# Altium PCB water_sensor_pcb.PcbDoc
Units mil, origin at the board's own origin, x right, y up, seen from the top; angles counter-clockwise.
Board outline 2362.2 x 1377.95 mil, 2 copper layers (Top Layer, Bottom Layer); 39 components, 24 nets, 132 pads, 39 vias.
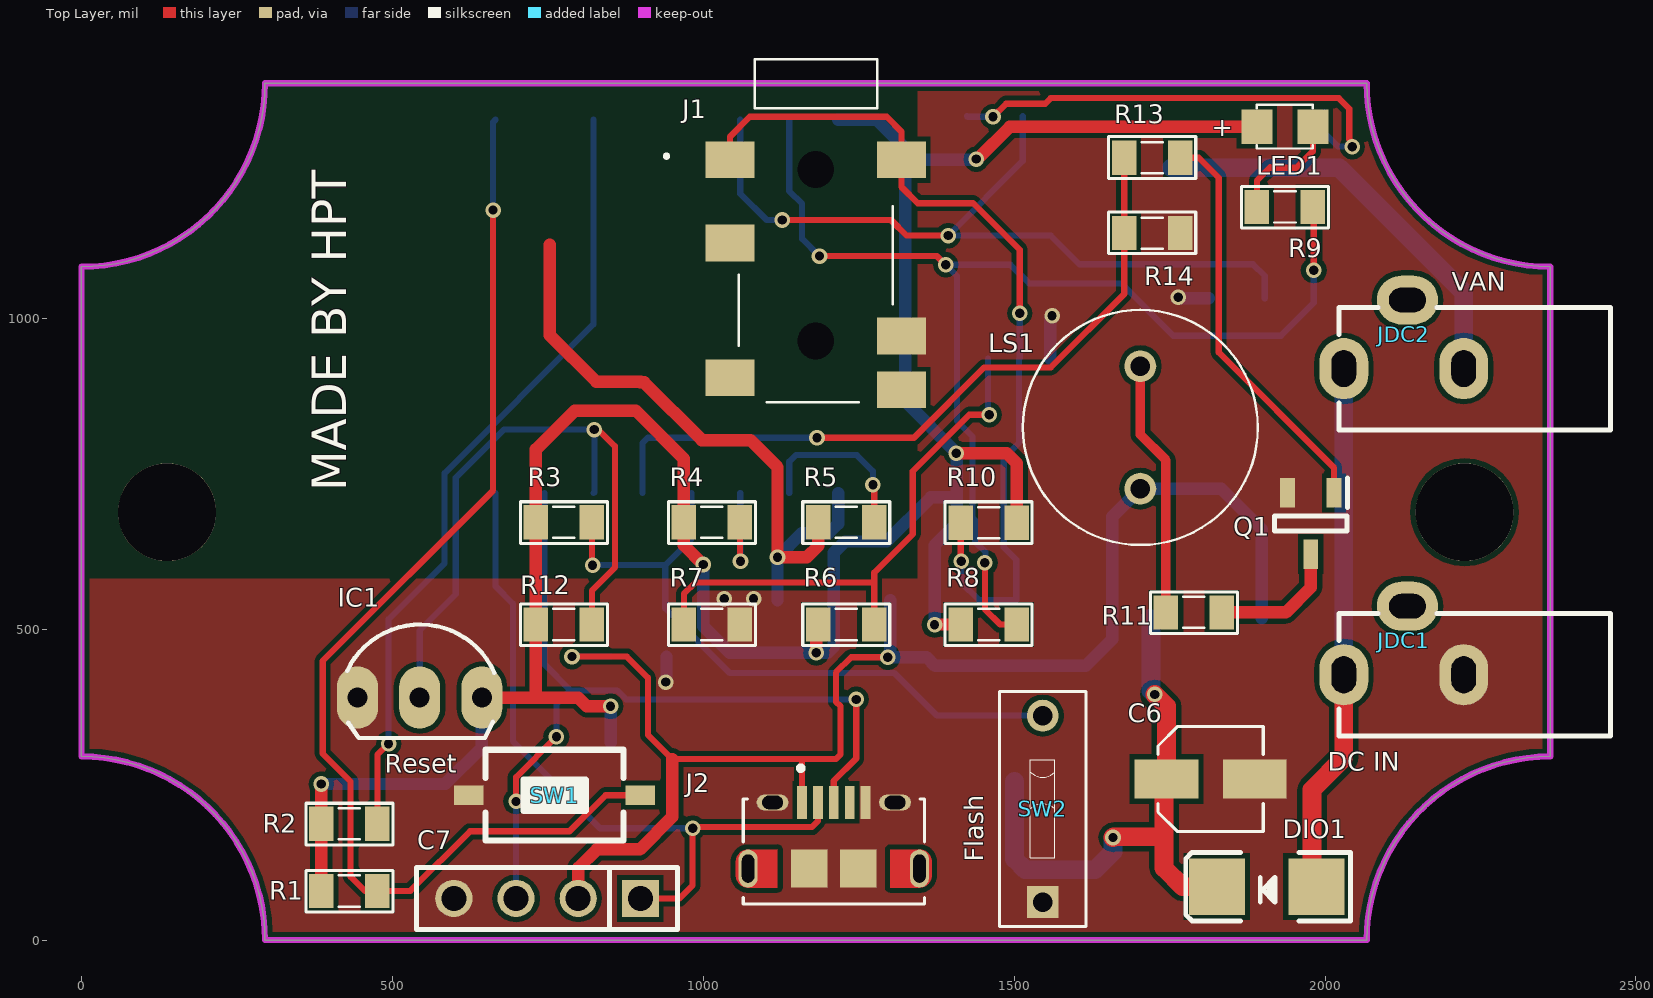
[diagram p0: Top Layer view]
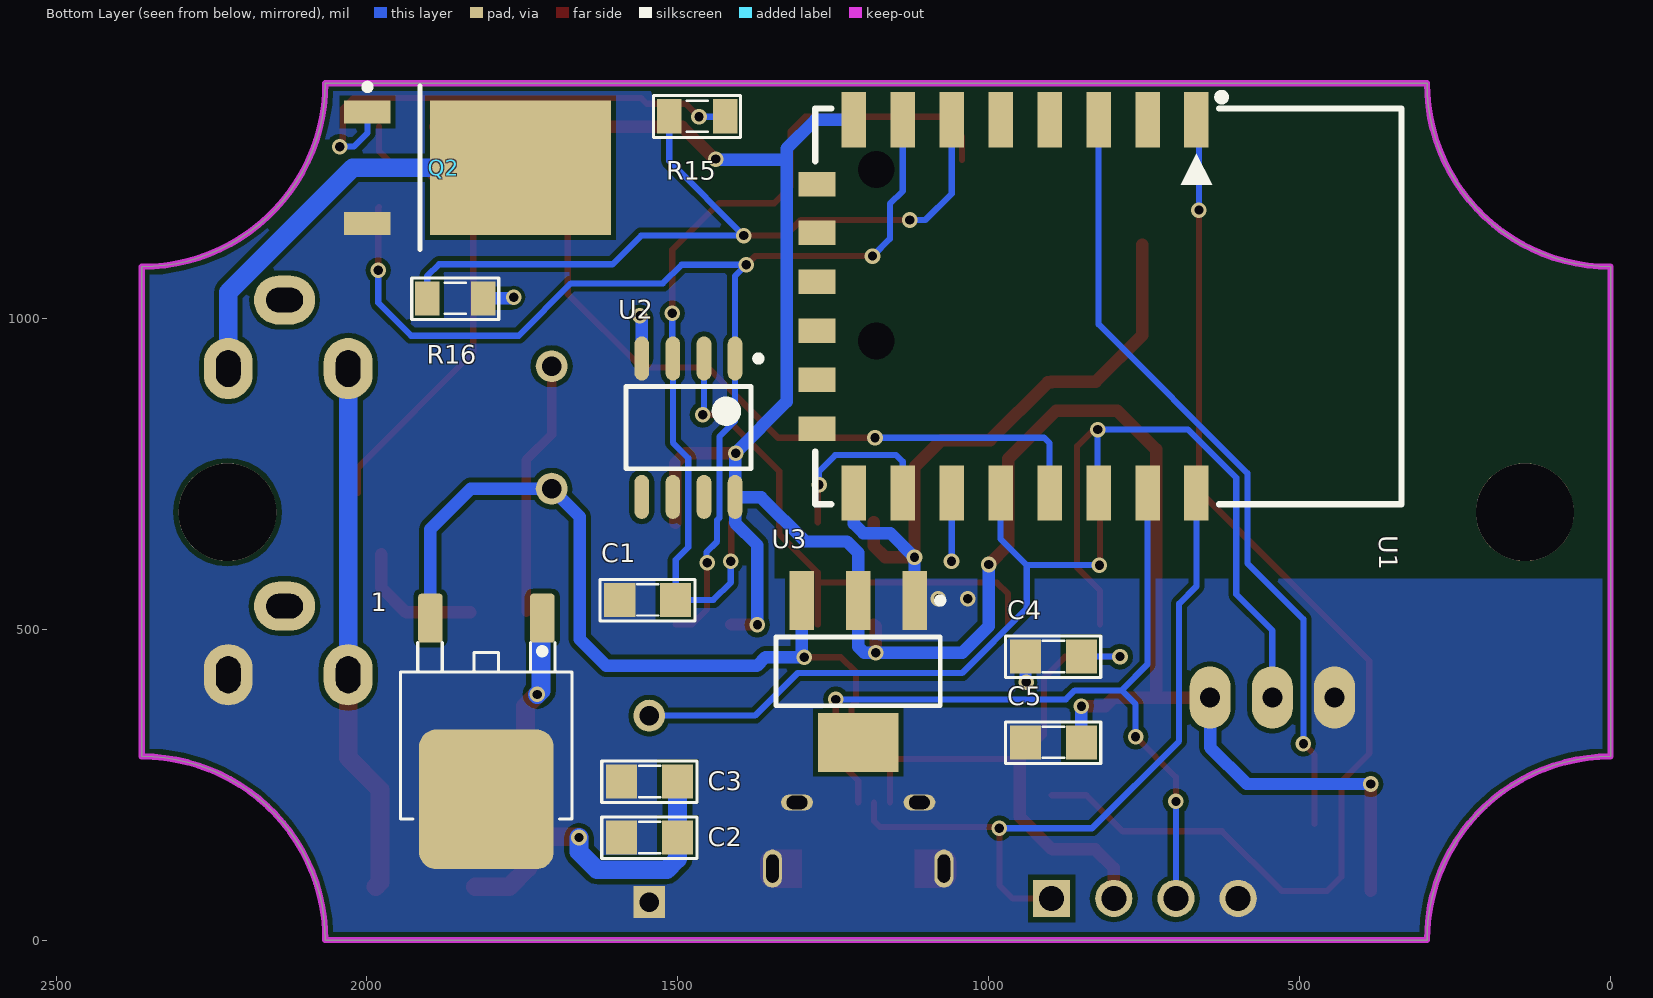
[diagram p1: Bottom Layer view, seen from below]
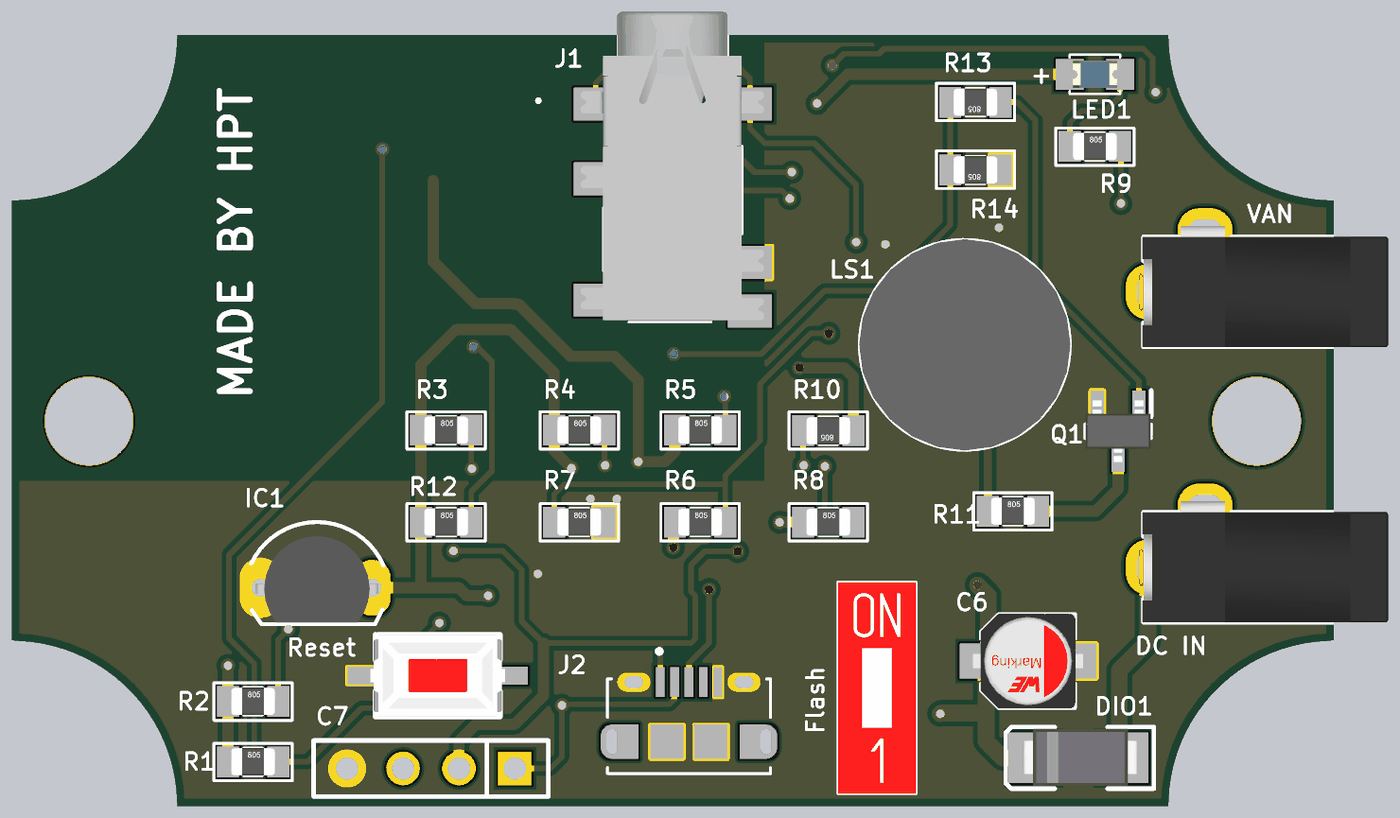
[diagram p2: 3D render of the assembled board from above, using the file's embedded part models]
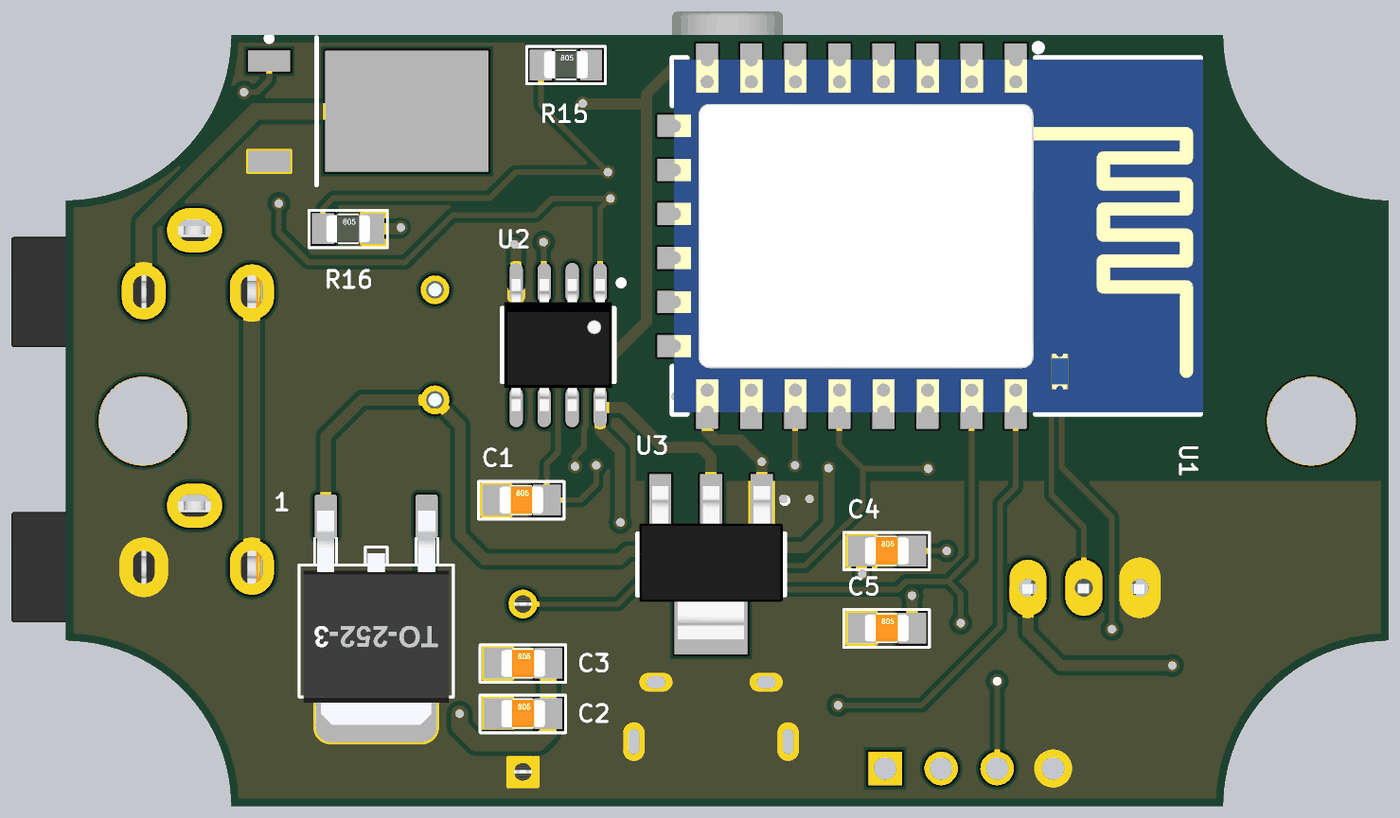
[diagram p3: 3D render of the assembled board from below, using the file's embedded part models]

## Layer stack, top to bottom
Top Solder: solder mask 0.4, Solder Resist, Dk 3.5
Top Layer: signal copper 1.4
Dielectric 1: dielectric 12.6, FR-4, Dk 4.8
Bottom Layer: signal copper 1.4
Bottom Solder: solder mask 0.4, Solder Resist, Dk 3.5

## Board outline
0,296.28 0,1083.68 ccw(c0,1378.95) 295.27,1378.95 2066.93,1378.95 ccw(c2362.2,1378.95) 2362.2,1083.68 2362.2,296.28 ccw(c2362.2,1) 2066.93,1 295.27,1 ccw(c0,1)

## Design rules (kind name [scope] priority, off if disabled: settings)
Clearance [All] p1: gap=8
PlaneConnect [All] p1: planeconnectstyle=Direct reliefexpansion=20 reliefentries=4 reliefconductorwidth=10 reliefairgap=10
PolygonConnect [All] p1: connectstyle=Direct reliefconductorwidth=10 reliefentries=4 polygonreliefangle="90 Angle" airgapwidth=10
RoomDefinition water_sensor_schematic [InComponentClass('water_sensor_schematic')] p1: confinementstyle=ConfineIn formatcopy=TRUE lockcomponents=FALSE outline -4470,-1049 -2470,-1049 -2470,-49 -4470,-49
RoomDefinition mosfet [InComponentClass('mosfet')] p2: confinementstyle=ConfineIn formatcopy=TRUE lockcomponents=FALSE outline -4470,-1049 -2470,-1049 -2470,-49 -4470,-49
RoutingVias [All] p1: holewidth=15 width=25 viastyle="Through Hole" minholewidth=15 minwidth=25 maxholewidth=28 maxwidth=50
SolderMaskExpansion [All] p1: expansion=4
Width [All] p1: maxlimit=100 minlimit=10 preferedwidth=10
29 further rules are at their usual default settings.

## Classes and differential pairs
component class mosfet: JDC2 Q2 R15 R16 R22
component class water_sensor_schematic: 1 C1 C2 C3 C4 C5 C6 C7 DIO1 IC1 J1 J2 JDC1 LED1 LS1 Q1 R1 R2 R3 R4 R5 R6 R7 R8 R9 R10 R11 R12 R13 R14 SW1 SW2 U1 U2 U3

## Components (designator, comment, footprint, x,y, rotation, side; value= is the part's Value field where it differs from the comment)
1 "LM78xx" TO252-123 1808,373 r0 bottom
C1 "104" SM-CAP-0805 1593.5,548 r180 bottom
C2 "104" SM-CAP-0805 1590.5,166 r180 bottom
C3 "104" SM-CAP-0805 1590.5,256 r180 bottom
C4 "104" SM-CAP-0805 941,457 r180 bottom
C5 "104" SM-CAP-0805 941,319 r180 bottom
C6 "CN-ALU-SMD" CAP-ALU-SMD-4.5x5x1.4 1816,260 r0 top
C7 "JP4" JP4-C1T 899,68 r180 top
DIO1 "Diode SMD" DIO-SMD-106 1906,87 r0 top
IC1 "DS18S20" DS18S20 544.06,391.02 r0 top locked
J1 "PJ-3420-A-SMT" PJ3420ASMT 1181.1,1102.36 r270 top locked
J2 "10118194-0001LF" AMPHENOL_10118194-0001LF 1210,116 r0 top
JDC1 "Jac DC" DC3 2030.12,427.72 r180 top
JDC2 "Jac DC" DC3 2030.12,920 r180 top
LED1 "LED" LED-0805-Blue 1890.5,1309 r0 top
LS1 "CMI-9605-1280T" CMI96051280T 1703,727 r180 top locked
Q1 "AO3400A" SOT95P280X125-3N 1977,671 r270 top
Q2 "IRF3708" TO-252AA_N 1822,1243 r180 bottom
R1 "10K" RES-SMD-0805 431,80 r0 top
R2 "10K" RES-SMD-0805 431,188 r0 top
R3 "10K" RES-SMD-0805 776,673 r0 top
R4 "10K" RES-SMD-0805 1014,673 r0 top
R5 "10K" RES-SMD-0805 1230,673 r0 top
R6 "10K" RES-SMD-0805 1230,508.5 r0 top
R7 "10K" RES-SMD-0805 1014,508.5 r0 top
R8 "10K" RES-SMD-0805 1459,508.5 r0 top
R9 "1K" RES-SMD-0805 1935.5,1180 r0 top
R10 "1M" RES-SMD-0805 1459,672 r180 top
R11 "0R" RES-SMD-0805 1789,528 r0 top
R12 "4K7" RES-SMD-0805 776,508.5 r0 top
R13 "1K" RES-SMD-0805 1722,1259 r180 top
R14 "10K" RES-SMD-0805 1722,1138 r180 top
R15 "1K" RES-SMD-0805 1469,1326 r180 bottom
R16 "10K" RES-SMD-0805 1858,1033 r180 bottom
SW1 "Reset" SW1-SMD 761,234 r0 top
SW2 "Flash" SW-DIP1-1 1546,212 r0 top
U1 "ESP_12_E" ESP_12_E 666,1335 r270 bottom
U2 "LM393" SO8 1483,825 r270 bottom
U3 "LM1117-3.3V" SOT223 1210,433 r0 bottom

## Footprints (in the part's own frame and the unit in brackets; to place one, negate y for a bottom-side part, rotate by r counter-clockwise, add the part's x,y. Pads: shape width x height; smd on the part's side, far side on the other; paste and mask are expansions set on the pad)
AMPHENOL_10118194-0001LF [mm]
  rect 0.4x1.35 smd: 1(-1.3,2.7) 2(-0.65,2.7) 3(0,2.7) 4(0.65,2.7) 5(1.3,2.7)
  oval 1.3x0.65 hole 0.55 slot 0.85 at 0 deg: S1(-2.5,2.7) S2(2.5,2.7)
  oval 0.775x1.55 hole 0.5 slot 1.15 at 90 deg: S3(-3.5,0) S6(3.5,0)
  rect 1.5x1.55 smd: S4(-1,0) S5(1,0)
  Top Layer region: 193 vertices and 0 holes, not listed, extent -4,-0.775 -2.3,0.78
  Top Layer region: 193 vertices and 0 holes, not listed, extent 2.3,-0.78 4,0.775
  silkscreen extent -3.7,-1.45 3.7,4.2
CAP-ALU-SMD-4.5x5x1.4 [mm]
  rect 2.6x1.6 smd: 1(-1.8,0) 2(1.8,0)
  silkscreen extent -2.15,-2.15 2.15,2.15, body extent -2.5,-2.15 2.5,2.15, height 5.45
CMI96051280T [mm]
  round 1.3 hole 0.8: 1(0,0) 2(0,-5)
  silkscreen extent -4.8,-7.3 4.8,2.3, body extent -4.8,-7.3 4.8,2.3, height 5.6
DC3 [mm] "WR-DC_DC Power Jack_Right Angled_THT Center Pin ?1.0_Plug ID ?1.05_Plug OD ?3.5"
  oval 2x2.5 hole 1 slot 1.5 at 90 deg: 1(0,0) 2(-4.9,0)
  oval 2.5x2 hole 1 slot 1.5 at 0 deg: 3(-2.6,-2.8)
  silkscreen extent -10.9,-2.5 0.2,2.5, body extent -10.9,-3 0.4,2.5, height 7.81
DIO-SMD-106 [mil]
  rect 90x90.55 smd: 1(80,0) 2(-80,0)
  silkscreen extent -130,-55 135,55, body extent -99,-50 106,52, height 95
DS18S20 [mil] "TO-92"
  oval 66x100 hole 32: 3(100,0) 4(0,0) 5(-100,0)
  silkscreen extent -117,-65 120,118, body extent -109,-62 111,93, height 119
ESP_12_E [mm] "ESP-12 Wi-Fi Module by AI-Thinker"
  rect 2.25x1 smd: 1(0.375,0) 2(0.375,-2) 3(0.375,-4) 4(0.375,-6) 5(0.375,-8) 6(0.375,-10) 7(0.375,-12) 8(0.375,-14) 15(15.625,-14) 16(15.625,-12) 17(15.625,-10) 18(15.625,-8) 19(15.625,-6) 20(15.625,-4) 21(15.625,-2) 22(15.625,0)
  rect 1x1.5 smd: 9(3,-15.5) 10(5,-15.5) 11(7,-15.5) 12(9,-15.5) 13(11,-15.5) 14(13,-15.5)
  silkscreen extent -0.7,-15.57 16.08,8.37, body extent 0,-15.49 16,8.51, height 2.75
JP4-C1T [mm] "4 row, straight, gold plating"
  rect 1.52x1.52 hole 1.02: 1(0,0)
  round 1.52 hole 1.02: 2(2.54,0) 3(5.08,0) 4(7.62,0)
  silkscreen extent -1.52,-1.27 9.14,1.27
LED-0805-Blue [mil]
  rect 50x55 smd: 1(0,0) 2(90,0)
  silkscreen extent 0,-35 90,35, body extent 5,-25 85,25, height 43
PJ3420ASMT [mm]
  rect 1.5x2 smd: 1(-3.9,-3.5) 2(-3.9,3.5) 3(-0.5,-3.5) 4(3.3,3.5) 5(5.5,3.5) 6(5,-3.5)
  round 0.75 hole 1.5 unplated: MH1(-3.5,0) MH2(3.5,0)
  silkscreen extent -8,-6.15 6,3.15, body extent -8.08,-4.17 5.92,4.13, height 4.85
RES-SMD-0805 [mil]
  rect 39.37x55 smd: 1(-45,0) 2(45,0)
  silkscreen extent -70,-34 70,33, body extent -39,-25 39,25, height 31
SM-CAP-0805 [mil]
  rect 50x55 smd: 1(0,0) 2(90,0)
  silkscreen extent -32,-34 121,33, body extent 6,-25 84,25, height 31
SO8 [mm] "SOIC, 8-Leads, Body 4.9x3.9mm, Pitch 1.27mm, IPC High Density"
  oval 1.8x0.6 smd: 1(-2.825,1.905) 2(-2.825,0.635) 3(-2.825,-0.635) 4(-2.825,-1.905) 5(2.825,-1.905) 6(2.825,-0.635) 7(2.825,0.635) 8(2.825,1.905)
  silkscreen extent -2.95,-2.55 1.68,2.98, body extent -2.99,-2.45 3,2.45, height 1.6
SOT95P280X125-3N [mm]
  rect 1.2x0.6 smd: 1(-1.25,0.95) 2(-1.25,-0.95) 3(1.25,0)
  silkscreen extent -1.85,-1.48 0.3,1.5, body extent -1.4,-1.48 1.4,1.48, height 1.25
SOT223 [mm]
  rect 1x2.4 smd: 1(-2.3,-2.9) 2(0,-2.9) 3(2.3,-2.9)
  rect 3.3x2.4 smd: 4(0,2.9)
  silkscreen extent -3.47,-3.02 3.35,1.4, body extent -3.25,-3.56 3.25,3.4, height 1.68
SW1-SMD [mm]
  rect 1.2x0.8 smd: 1(-3.5,0) 2(3.5,0)
  silkscreen extent -2.82,-1.85 2.82,1.85, body extent -3.05,-1.85 3.05,1.85, height 2.5
SW-DIP1-1 [mm] "01p, 2.54mm Pitch, Horizontal, Box Type, THT, flat Actuator, red, without Tape, Tube"
  rect 1.3x1.3 hole 0.8: 1(0,-3.81)
  round 1.3 hole 0.8: 2(0,3.81)
  silkscreen extent -1.77,-4.8 1.77,4.8, body extent -1.77,-4.8 1.77,4.8, height 5.4
TO252-123 [mm]
  round 0.5 on Mech15: 0(0,0)
  rrect25% 1x2 smd: 1(-2.285,-3.7) 3(2.285,-3.7)
  rrect25% 5.5x5.7 smd: 2(0,3.7)
  silkscreen extent -3.5,-2.7 3.5,4.5, body extent -3.3,-3.95 3.3,5.76, height 2.31
TO-252AA_N [mm] "D-PAK, 4-Leads, Body 6.1x6.5mm, Pitch 2.28mm, Lead Span 9.9mm, IPC Medium Density"
  rect 1.9x0.95 smd: 1(-4.5,2.28) 3(-4.5,-2.28)
  rect 7.4x5.5 smd: 4(1.75,0)
  silkscreen extent -4.62,-3.35 -2.35,3.43, body extent -2.25,-3.37 4.1,3.37, height 2.38

## Part data
1: "Positive Voltage Regulator"
C1 C2 C3 C4 C5: library part CN
C6: "Polarized Capacitor (Axial)"
C7: "WR-PHD 2.54 mm Angled Socket Header"
DIO1: "Default Diode"
IC1: "High Precision  1-Wire® Digital Thermometer"
J1: "Connector"
J2: "USB - micro B USB 2.0 Receptacle Connector 5 Position Surface Mount, Right Angle; Through Hole"
JDC1 JDC2: library part DCIN, "Jac DC input"
LED1: library part "LED SMD"
LS1: "Loudspeaker or Buzzer"
Q1: "MOSFET (N-Channel)"
Q2: library part IRFR3911, "HEXFET Power MOSFET"
R1 R2 R3 R4 R5 R6 R7 R8 R9 R10 R11 R12 R13 R14 R15 R16: library part Res-SMD, "Resistor"
SW1 SW2: library part SW2, "Switch button 2 pin"
U1: "ESP-12 Wi-Fi Module by AI-Thinker"
U2: "IC DUAL COMPARATOR"
U3: library part LM1117, "800mA Low-Dropout Linear Regulator"

## Free pads (board coordinates)
  round 157.48 hole 157.48: 0(137.8,688.98) 1(2224.41,688.98)

## Via types
v1: diameter 25, hole 15, Top Layer to Bottom Layer, tented both sides, 39 vias

## Nets (pads, with @x,y where several pads share a name; then routed paths per layer and width w, separated by ;. In a path a pad name is that pad's centre, name@x,y a point inside that pad or via, vN(x,y) a via of type N, cw(c..) or ccw(c..) an arc to the next point about the centre after c; other vN are vias at no path point)
3.3V: C5.2 IC1.3 LED1.1 R1.1 R2.1 R3.1 R4.1 R6.1 R8.1 R10.1 R12.1 U1.8 U2.8 U3.2 | length 4218.2
  Top Layer w20: R1.1 R2.1 v1(386,252) ; IC1.3 732,391.02 ; v1(851,377) 813,377 798.98,391.02 732,391.02 ; v1(1000,605) 969,636 R4.1 969,775 891.5,852.5 793.5,852.5 731,790 R3.1 R12.1 731,392.03 732,391.02 ; v1(1182,463) 1182,505.5 R6.1 ; v1(1372,508) 1372.5,508.5 R8.1 ; v1(1407,784) 1488,784 1504,768 R10.1 ; v1(1439,1257) 1440,1258 1442.13,1258 1493.13,1309 LED1.1
  Bottom Layer w20: v1(386,252) 585,252 644.06,311.06 IC1.3 ; C5.2 v1(851,377) ; v1(1000,605) 1000,506 1043,463 v1(1182,463) 1200,463 1210,473 U3.2 1210,624 1228,642 1295,642 1366,713 1407.22,713 U2.8 ; U1.8 1278.76,1320.24 1325,1274 1325,1256 ; v1(1372,508) 1372,636 1408,672 U2.8 ; v1@1407.5,784.5 1325,867 1325,1256 ; v1@1408,784 U2.8 ; v1(1439,1257) 1438,1256 1325,1256
5V: 1.3 C4.2 C7.2 J2.1 LS1.1 U3.3 | length 2347.6
  Top Layer w10: v1(789,457) 877,457 911,423 911,331 950,292 1158.82,292 ; J2.1 1158.82,292 ; v1(1297,456) 1238,456 1213.5,431.5 1213.5,384.44 1221,376.94 1221,300 1213,292 1158.82,292
  Top Layer w20: C7.2 799,117 829,147 898,147 950,199 950,292
  Bottom Layer w10: v1(789,457) C4.2 ; v1(1297,456) v1@1300.55,459.55
  Bottom Layer w20: v1(1297,456) 1359,456 1373,442 1615,442 1658,485 1658,682 LS1.1 1833,727 1897.96,662.04 1.3 ; v1@1300.55,459.55 U3.3
12V: DIO1.1 JDC1.1 JDC2.1 | length 857.1
  Top Layer w30: DIO1.1 1979,94 1979,243 2030.12,294.12 JDC1.1
  Bottom Layer w30: JDC1.1 JDC2.1
BUZZER: R13.2 R14.2 U1.19 | length 1173.5
  Top Layer w10: v1(1183,809) 1339,809 1452,922 1559,922 1677,1040 R14.2 R13.2
  Bottom Layer w10: U1.19 902.22,800.22 911,809 v1(1183,809)
GND: 1.2 C1.1 C2.1 C3.1 C4.1 C5.1 C6.2 C7.4 IC1.5 J1.4 J2.5 J2.S1 J2.S2 J2.S3 J2.S4 J2.S5 J2.S6 JDC1.2 Q1.2 Q2.3 R5.1 R7.2 R14.1 R16.2 SW1.1 SW2.1 U1.15 U2.4 U3.1 | length 1257.6
  Top Layer w20: 753,1119 753,974 828,899 900,899 899,898 905,898 998,805 1076,805 1119.45,761.55 v1(1119.45,616.45) 1166.45,616.45 1185,635 R5.1
  Bottom Layer w20: v1(940,416) 941,417 C4.1 ; U3.1 v1(1119.45,616.45) 1158.3,655.3 1201.7,655.3 1217.18,670.78 U1.15 ; U2.4 1558,1002 v1(1561,1005) ; v1(1764,1035) 1766,1033 R16.2
  other v1: 1034,550 1081,550
Net1_1: 1.1 C2.2 C3.2 C6.1 DIO1.2 | length 919.7
  Top Layer w30: v1(1659,166) 1660,167 1741,167 ; v1(1726,396) 1745.13,376.87 C6.1 1741,255.87 1741,167 ; DIO1.2 1771,87 1741,117 1741,167
  Bottom Layer w30: C3.2 C2.2 1500.5,131.5 1518,114 1630,114 1659,143 v1(1659,166) ; 1.1 1720,516.71 1720,402 v1(1726,396)
NetC1_2: C1.2 J1.1 J1.2 R10.2 U2.3 | length 1435.6
  Top Layer w10: J1.1 1043.31,1293.31 1075,1325 1295,1325 1318.9,1301.1 J1.2 1318.9,1212.1 1345,1186 1434,1186 1509,1111 v1(1509,1009) ; R10.2 1414,611 v1(1415,610)
  Bottom Layer w10: v1(1415,610) 1415,576 1443,548 C1.2 1503.5,612.5 1483.19,632.81 1483.19,776.19 1508,801 U2.3 1509,937.22 v1(1509,1009)
NetJDC2_2: JDC2.2 Q2.4 | length 675.8
  Bottom Layer w30: Q2.4 2023,1243 2223.03,1042.97 JDC2.2
NetLED1_2: LED1.2 R9.1 | length 192.3
  Top Layer w10: R9.1 1890.5,1222.5 1912,1244 1913,1243 1954,1243 1980.5,1269.5 LED1.2
NetLS1_2: LS1.2 R11.1 | length 412.9
  Top Layer w15: LS1.2 1703,814 1744.09,772.91 1744.09,528.09 R11.1
NetQ1_1: Q1.1 R13.1 | length 658.8
  Top Layer w10: R13.1 1797,1259 1829,1227 1829,946 2014.4,760.6 Q1.1
NetQ1_3: Q1.3 R11.2 | length 213.4
  Top Layer w20: R11.2 1937,528 1977,568 Q1.3
NetQ2_1: Q2.1 R15.2 | length 785.8
  Top Layer w10: v1(1466,1325) 1487,1346 1550,1346 1559,1355 2022,1355 2039,1338 2039,1289 2044,1284 v1(2044,1277)
  Bottom Layer w10: R15.2 1425,1325 v1(1466,1325) ; Q2.1 1999.17,1298.83 2021,1277 v1(2044,1277)
NetR1_2: R1.2 SW1.2 U1.1 | length 1890.1
  Top Layer w10: v1(662,1175) 662,724 388,450 388,301 433,256 433,103 456,80 R1.2 529,80 625,176 785,176 843,234 SW1.2
  Bottom Layer w10: v1(662,1175) 662,1316.24 U1.1
NetR2_2: R2.2 U1.3 | length 1276.2
  Top Layer w10: R2.2 476,299 v1(494,317)
  Bottom Layer w10: v1(494,317) 494,517 584,607 584,752 823.48,991.48 U1.3
NetR3_2: R3.2 SW2.2 U1.18 | length 1067.6
  Top Layer w10: R3.2 821,605 v1(822,604)
  Bottom Layer w10: v1(822,604) 939,604 ; U1.18 980.96,645.96 939,604 ; SW2.2 1376,362 1307.5,430.5 1042.97,430.5 939,534.47 939,604
NetR4_2: R4.2 U1.17 | length 173.4
  Top Layer w10: R4.2 1059,611 v1(1060,610)
  Bottom Layer w10: U1.17 1059.7,610.3 v1(1060,610)
NetR5_2: R5.2 U1.16 | length 283.1
  Top Layer w10: v1(1273,733) 1275,731 R5.2
  Bottom Layer w10: U1.16 1138.44,770.44 1149,781 1247,781 1273,755 v1(1273,733)
NetR6_2: R6.2 R7.1 U2.2 | length 886.9
  Top Layer w10: R7.1 969,558 987,576 1275,576 ; R6.2 1275,592 1337,654 1337,755 1428,846 v1(1460,846)
  Bottom Layer w10: U2.2 1458,848 v1(1460,846)
OUT: R8.2 R9.2 U1.7 U2.1 | length 1906
  Top Layer w10: v1(1187,1101) 1376,1101 v1(1390,1087) ; v1(1453,608) 1453,533 1477.5,508.5 R8.2 ; R9.2 1982,1178.5 v1(1982,1078)
  Bottom Layer w10: U1.7 1138.44,1205.56 1159,1185 1159,1129 v1(1187,1101) ; v1(1453,608) 1453,611 1454,612 1454,625 1437,642 1437,676.07 1433.19,679.88 1433.19,810.81 1408,836 U2.1 1408,1069 v1(1390,1087) 1494,1087 1524,1057 1672,1057 1756,973 1929,973 1982,1026 v1(1982,1078)
RX: C7.1 J2.2 U1.22 | length 1178.2
  Top Layer w10: C7.1 962,68 983,89 v1(983,181) 984.72,182.72 1174.72,182.72 1184.41,192.41 J2.2
  Bottom Layer w10: U1.22 666,570 694,542 694,321 834,181 v1(983,181)
SENSOR: IC1.4 R12.2 U1.20 | length 1081.4
  Top Layer w10: R12.2 821,563 858,600 858,795 831,822 v1(825,822)
  Bottom Layer w10: IC1.4 544.06,499.06 602,557 602,744.54 679.46,822 v1(825,822) 825,721.36 U1.20
TX: C7.3 J2.3 U1.21 | length 1351.5
  Top Layer w10: v1(699,224) 699,263 v1(764,328) ; J2.3 1210,257 1246,293 v1(1246,388)
  Bottom Layer w10: C7.3 v1(699,224) ; U1.21 744.74,444.26 786.5,402.5 ; v1(764,328) 764,380 786.5,402.5 ; v1(1246,388) 876.06,388 861.56,402.5 786.5,402.5
VAN: R15.1 R16.1 U1.6 | length 1294.7
  Top Layer w10: v1(1127,1159) 1302,1159 1327,1134 v1(1394,1134)
  Bottom Layer w10: U1.6 1059.7,1201.3 1102,1159 v1(1127,1159) ; R15.1 1514,1254 v1(1394,1134) 1559,1134 1605,1088 1884,1088 1903,1069 R16.1
pads on no net: 1.0 J1.3 J1.5 J1.6 J1.MH1 J1.MH2 J2.4 JDC1.3 JDC2.3 U1.2 U1.4 U1.5 U1.9 U1.10 U1.11 U1.12 U1.13 U1.14 U2.5 U2.6 U2.7 U3.4

## Polygon pours and split planes (outlines as drawn)
GND on Top Layer "Top Layer-No Net" (solid, remove dead copper, pour order 0): 0,296.28 0,582 1366,582 1345,582 1345,1378.95 2066.93,1378.95 2362.2,1083.68 2362.2,296.28 2066.93,1 295.27,1
GND on Bottom Layer "Top Layer-No Net" (solid, remove dead copper, pour order 2): 0,296.28 0,582 1345,582 1345,1378.95 2066.93,1378.95 2362.2,1378.95 2362.2,296.28 2362.2,1 295.27,1

## Keep-outs
Keep-Out Layer:
  the board outline again, w10

## Silkscreen, mask and mechanical layers (free items; w line width, h text height)
Top Overlay:
  text "+" at 1818,1294 h30
  text "VAN" at 2204,1045 h30
  text "MADE BY HPT" at 426,723 h55 r90
  text "DC IN" at 2004,273 h30

## Text inside footprints (layer, text, board x,y; h text height)
J2: Mechanical 13 "PCB END" at 1133.23,33.32 h19.68
U1: Mechanical 13 "CUTOUT POLYGON" at 376,1330 h10 r90; Mechanical 13 "ANTENNA AREA" at 356,1330 h10 r90